# EAGLE board Spectacular Robo (EAGLE 9.7.0)

Size 189.67 x 228.56 mm. Coordinates in mm from the lower left corner, seen from the top.
Outline: 0,0 189.67,0 189.67,228.56 0,228.56 0,0
Copper layers (1*16): Top 0.035mm / dielectric 1.5mm / Bottom 0.035mm
Design rules "default": minimum track width 6mil, minimum drill 0.35mm, track to track 6mil, track to pad 6mil, pad to pad 6mil, via to via 6mil, smd to smd 6mil, copper to edge 40mil, drill to drill 6mil, minimum pad ring 10mil, minimum via ring 8mil, stop-mask expansion 4mil, vias tented up to drill 0mil, thermal gap 10mil

## Footprints (pad centres in the part's own frame; a part is rotated, then mirrored left to right if it is on the bottom)
WS2812-STRIP = drill 1.016 long: 1 -3.81,0; 2 -1.27,0; 3 1.27,0; 4 3.81,0
RESAD1016W63L850D250B = drill 0.83 pad 1.43: 1 -5.08,0; 2 5.08,0
SWITCH-MOMENTARY-PTH-6.5MM = drill 1.016 pad 1.88: 1 -3.251,2.261; 2 3.251,2.261; 3 -3.251,-2.261; 4 3.251,-2.261
ARDUINO-UNO-R3-SHIELD = drill 1.016 pad 1.88: 3.3V 24.13,-2.54; 5V 24.13,0; A0 24.13,12.7; A1 24.13,15.24; A2 24.13,17.78; A3 24.13,20.32; A4 24.13,22.86; A5 24.13,25.4; AREF -24.13,-13.97; D2 -24.13,20.32; D3 -24.13,17.78; D4 -24.13,15.24; D5 -24.13,12.7; D6 -24.13,10.16; D7 -24.13,7.62; D8 -24.13,3.81; D9 -24.13,1.27; D10 -24.13,-1.27; D11 -24.13,-3.81; D12 -24.13,-6.35; D13 -24.13,-8.89; GND@0 24.13,2.54; GND@1 24.13,5.08; GND@2 -24.13,-11.43; IOREF 24.13,-7.62; NC 24.13,-10.16; RES 24.13,-5.08; RX -24.13,25.4; SCL -24.13,-19.05; SDA -24.13,-16.51; TX -24.13,22.86; VIN 24.13,7.62

## Placement (x,y rotation side)
LED1  WS2812B_STRIP  [WS2812-STRIP]  90.22,115.68 270 top
LED2  WS2812B_STRIP  [WS2812-STRIP]  90.22,127.22 270 top
LED3  WS2812B_STRIP  [WS2812-STRIP]  90.5,138.89 270 top
LED4  WS2812B_STRIP  [WS2812-STRIP]  90.5,150.43 270 top
LED5  WS2812B_STRIP  [WS2812-STRIP]  89.94,162.25 270 top
LED6  WS2812B_STRIP  [WS2812-STRIP]  89.94,173.78 270 top
LED7  WS2812B_STRIP  [WS2812-STRIP]  89.65,185.6 270 top
LED8  WS2812B_STRIP  [WS2812-STRIP]  89.65,197.14 270 top
LED9  WS2812B_STRIP  [WS2812-STRIP]  89.65,208.39 270 top
LED10  WS2812B_STRIP  [WS2812-STRIP]  89.79,220.23 270 top
LED11  WS2812B_STRIP  [WS2812-STRIP]  90.78,92.28 270 top
LED12  WS2812B_STRIP  [WS2812-STRIP]  90.78,103.81 270 top
LED13  WS2812B_STRIP  [WS2812-STRIP]  90.47,69.46 270 top
LED14  WS2812B_STRIP  [WS2812-STRIP]  90.47,80.99 270 top
R1  20  [RESAD1016W63L850D250B]  134.98,18.8 0 top
R2  20  [RESAD1016W63L850D250B]  157.84,18.8 0 top
R3  20  [RESAD1016W63L850D250B]  180.7,18.8 0 top
S1  SWITCH_MOMENTARY  [SWITCH-MOMENTARY-PTH-6.5MM]  127.36,7.37 90 top
S2  SWITCH_MOMENTARY  [SWITCH-MOMENTARY-PTH-6.5MM]  150.22,7.37 90 top
S3  SWITCH_MOMENTARY  [SWITCH-MOMENTARY-PTH-6.5MM]  173.08,7.37 90 top
U1  ARDUINO-UNO-R3-SHIELD  [ARDUINO-UNO-R3-SHIELD]  29.84,77.98 180 top

## Library data of the parts
LED1-LED14 R1-R3 S1-S3 U1 = Tinkercad

## Nets
U1_5V: LED1.2 LED2.2 LED3.2 LED4.2 LED5.2 LED6.2 LED7.2 LED8.2 LED9.2 LED10.2 LED11.2 LED12.2 LED13.2 LED14.2 S1.1 S1.2 S2.1 S2.2 S3.1 S3.2 U1.5V
U1_A0: LED10.1 U1.A0
U1_A1: LED14.1 U1.A1
U1_A2: LED13.1 U1.A2
U1_A3: R1.1 S1.3 S1.4 U1.A3
U1_A4: R2.1 S2.3 S2.4 U1.A4
U1_A5: R3.1 S3.3 S3.4 U1.A5
U1_D2: LED11.1 U1.D2
U1_D3: LED12.1 U1.D3
U1_D4: LED1.1 U1.D4
U1_D5: LED2.1 U1.D5
U1_D6: LED3.1 U1.D6
U1_D7: LED4.1 U1.D7
U1_D8: LED5.1 U1.D8
U1_D9: LED6.1 U1.D9
U1_D10: LED7.1 U1.D10
U1_D11: LED8.1 U1.D11
U1_D12: LED9.1 U1.D12
U1_GND: LED1.3 LED2.3 LED3.3 LED4.3 LED5.3 LED6.3 LED7.3 LED8.3 LED9.3 LED10.3 LED11.3 LED12.3 LED13.3 LED14.3 R1.2 R2.2 R3.2 U1.GND@0 U1.GND@1 U1.GND@2

## Tracks (layer width: path | path; a pad name or v marks a point on that pad's centre or on a via)
U1_5V  (20 unrouted)
U1_A0  (1 unrouted)
U1_A1  (1 unrouted)
U1_A2  (1 unrouted)
U1_A3  (3 unrouted)
U1_A4  (3 unrouted)
U1_A5  (3 unrouted)
U1_D2  (1 unrouted)
U1_D3  (1 unrouted)
U1_D4  (1 unrouted)
U1_D5  (1 unrouted)
U1_D6  (1 unrouted)
U1_D7  (1 unrouted)
U1_D8  (1 unrouted)
U1_D9  (1 unrouted)
U1_D10  (1 unrouted)
U1_D11  (1 unrouted)
U1_D12  (1 unrouted)
U1_GND  (19 unrouted)